# Altium PCB V3.3云台.PcbDoc (part 1 of 2)
Units mm, origin at the board's own origin, x right, y up, seen from the top; angles counter-clockwise.
Board outline 55 x 73 mm, 2 copper layers (Top Layer, Bottom Layer), stack 1.569 mm thick; 99 components, 126 nets, 372 pads, 178 vias.
Unrouted connection lines stored in the file: 226.
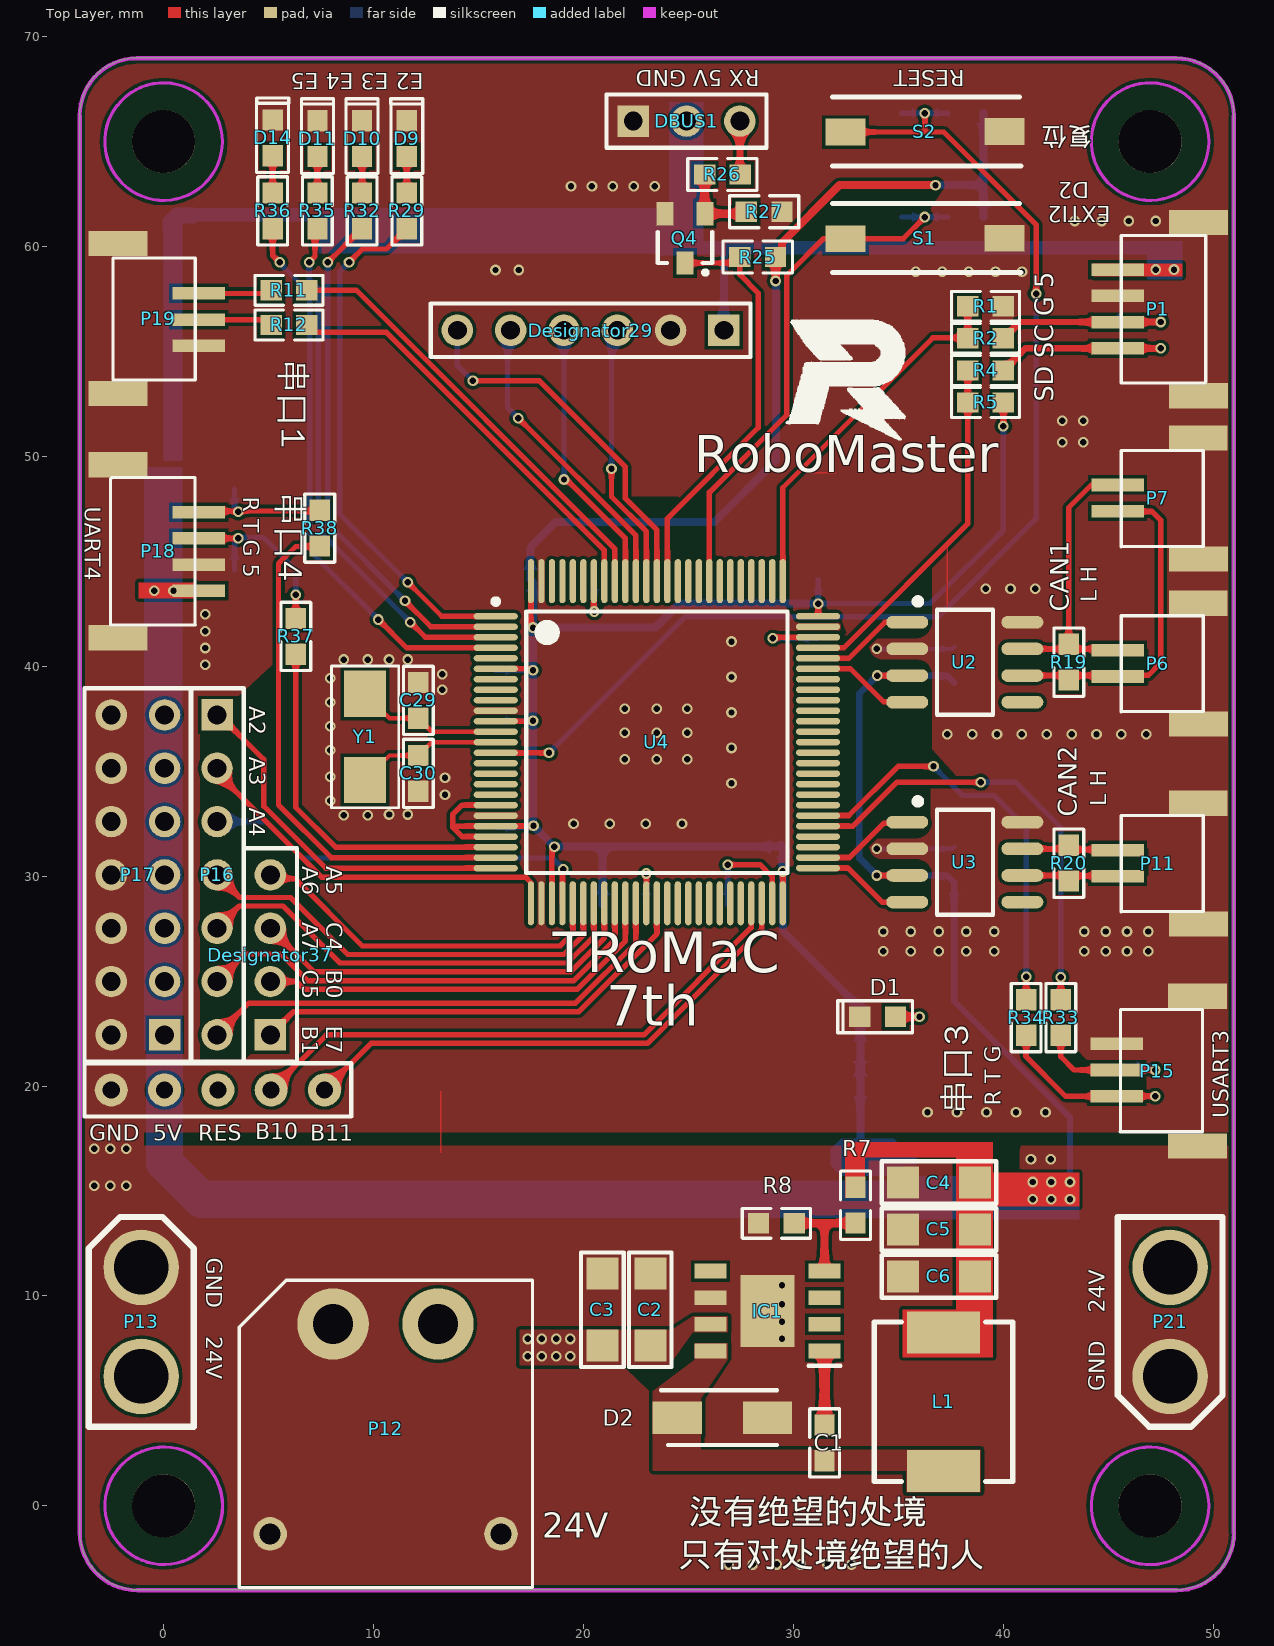
[diagram p0: Top Layer view]
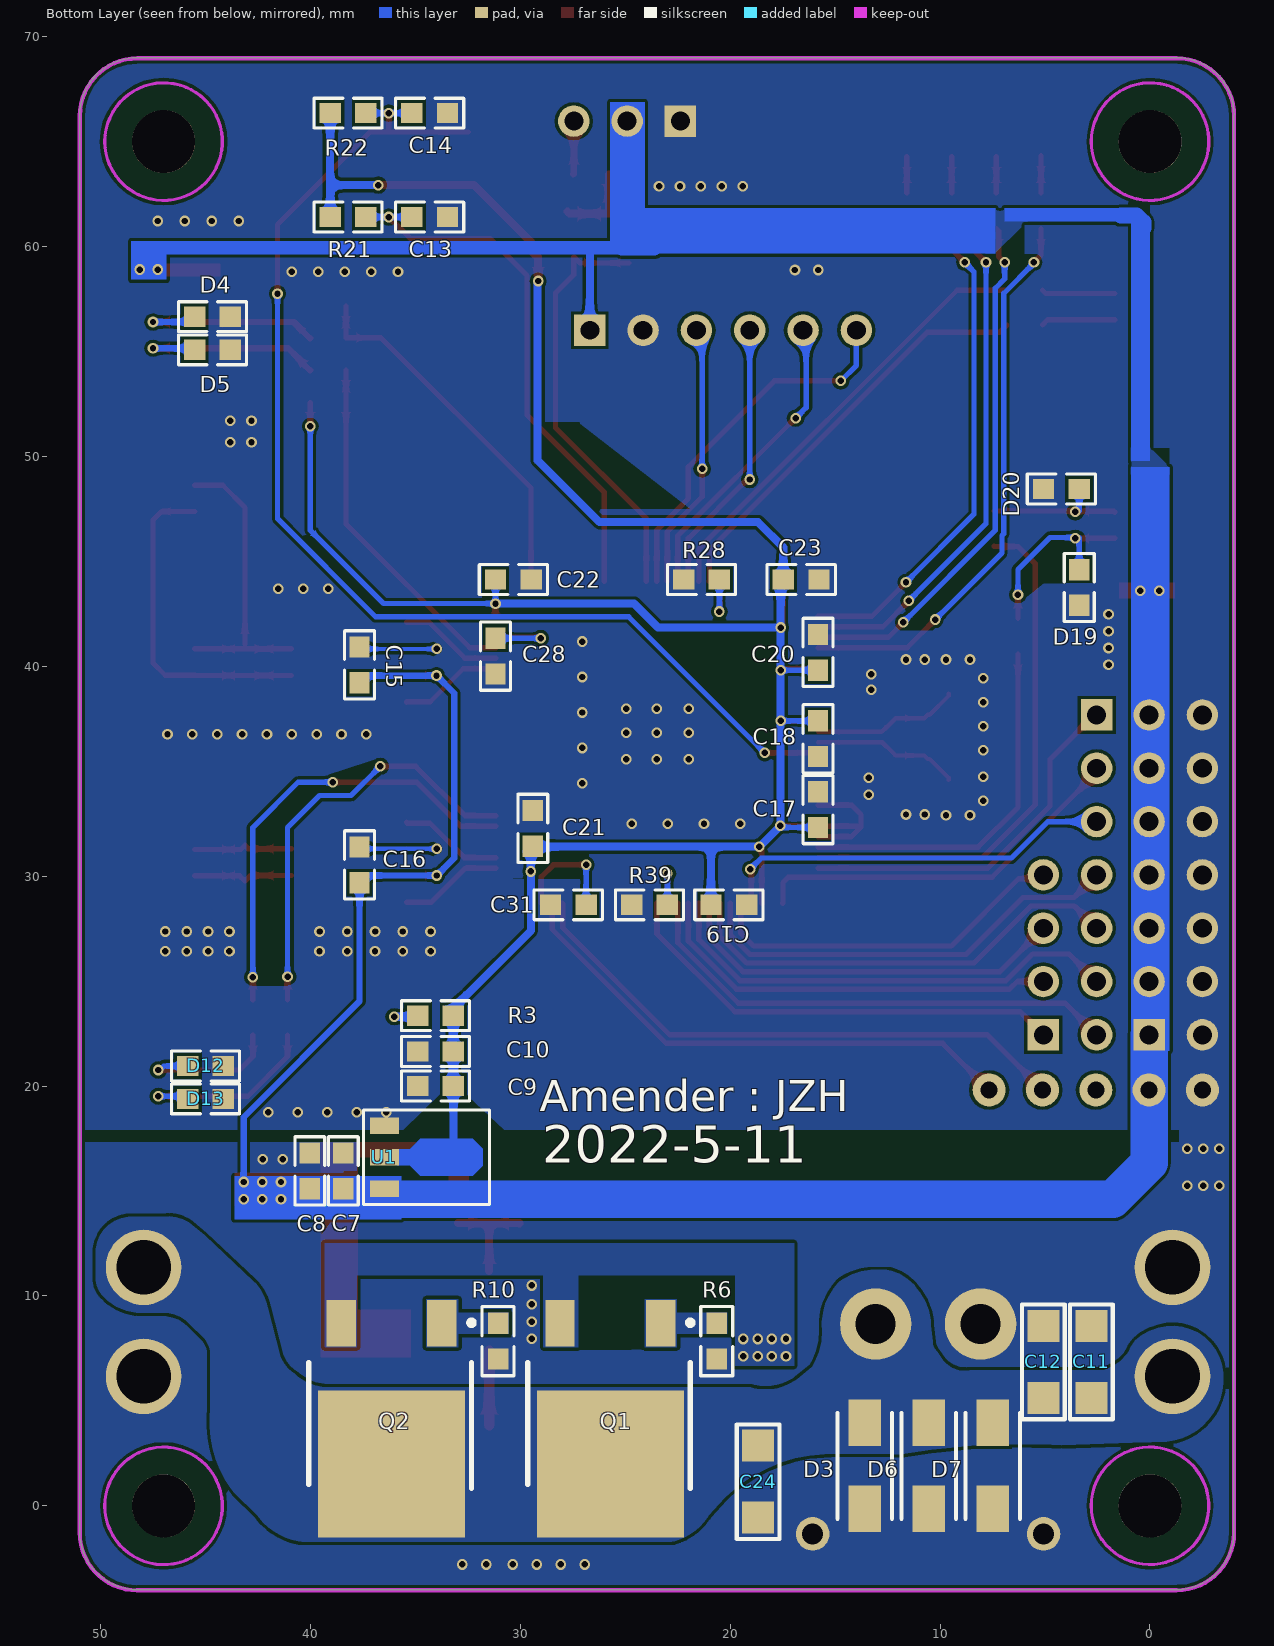
[diagram p1: Bottom Layer view, seen from below]
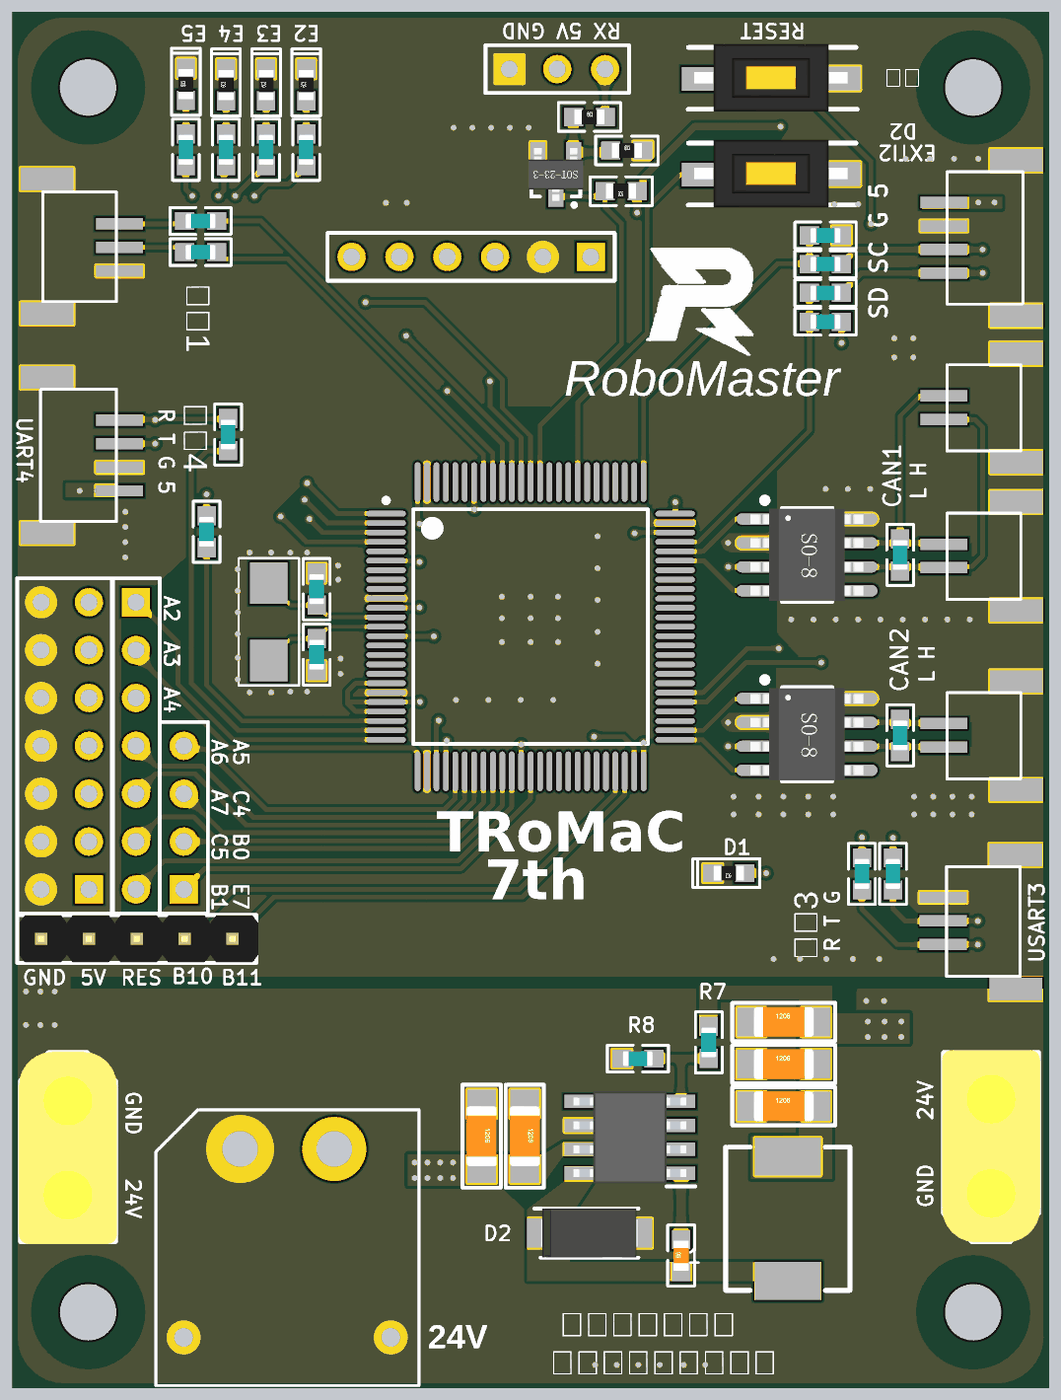
[diagram p2: 3D render of the assembled board from above, using the file's embedded part models]
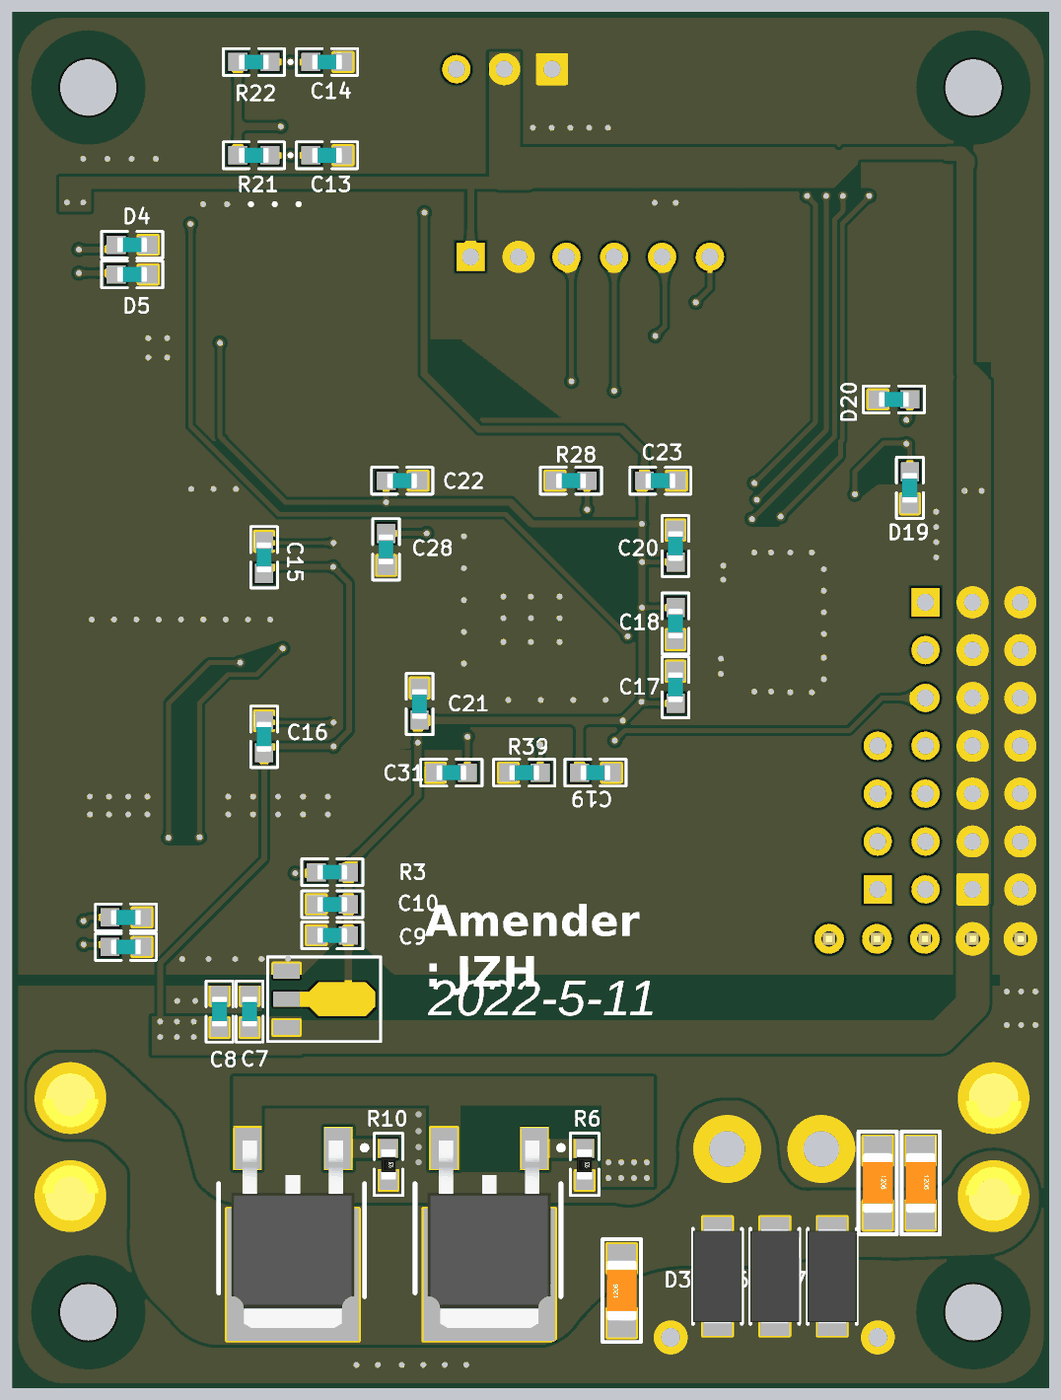
[diagram p3: 3D render of the assembled board from below, using the file's embedded part models]

## Layer stack, top to bottom
Top Solder: solder mask 0.0254, SM-001, Dk 4
Top Layer: signal copper 0.035
Dielectric 1: core 1.4986, Core-043, Dk 4.3
Bottom Layer: signal copper 0.035
Bottom Solder: solder mask 0.0254, SM-001, Dk 4

## Board outline
-4,-1.257 -4,66.256 -4.005,66.251 cw(c-1.261,66.251) -1.266,68.995 -1.266,68.99 48.246,68.99 cw(c48.246,66.246) 50.99,66.251 50.99,-1.271 50.995,-1.262 cw(c48.251,-1.262) 48.256,-4.005 48.261,-4 -1.257,-4 cw(c-1.257,-1.257)

## Design rules (kind name [scope] priority, off if disabled: settings)
Clearance [All] p1: gap=0.152 ignorepadtopadclearanceinfootprint=FALSE
ComponentClearance [All] p1: gap=0 collisioncheckmode=3 verticalgap=0 showdistances=FALSE
DiffPairsRouting DiffPair_DiffPairsRouting [InDifferentialPair ('NewDifferentialPair2')] p1: maxlimit=0.254 minlimit=0.203 mostfreqgap=0.203 toplayer_minwidth=0.203 toplayer_maxwidth=0.381 toplayer_prefwidth=0.203 bottomlayer_minwidth=0.203 bottomlayer_maxwidth=0.381 bottomlayer_prefwidth=0.203 maxuncoupledlength=12.7
DiffPairsRouting DiffPair_DiffPairsRouting_1 [All] p2: maxlimit=0.254 minlimit=0.203 mostfreqgap=0.203 toplayer_minwidth=0.203 toplayer_maxwidth=0.381 toplayer_prefwidth=0.203 bottomlayer_minwidth=0.203 bottomlayer_maxwidth=0.381 bottomlayer_prefwidth=0.203 maxuncoupledlength=12.7
DiffPairsRouting DiffPair_DiffPairsRouting_2 [InDifferentialPair ('NewDifferentialPair1')] p3: maxlimit=0.254 minlimit=0.203 mostfreqgap=0.203 toplayer_minwidth=0.203 toplayer_maxwidth=0.381 toplayer_prefwidth=0.203 bottomlayer_minwidth=0.203 bottomlayer_maxwidth=0.381 bottomlayer_prefwidth=0.203 maxuncoupledlength=12.7
DiffPairsRouting [All] p4: maxlimit=0.254 minlimit=0.254 mostfreqgap=0.254 toplayer_minwidth=0.381 toplayer_maxwidth=0.381 toplayer_prefwidth=0.381 bottomlayer_minwidth=0.381 bottomlayer_maxwidth=0.381 bottomlayer_prefwidth=0.381 maxuncoupledlength=12.7
HoleSize [All] p1: absolutevalues=TRUE maxlimit=5.08 minlimit=0.025 maxpercent=80.000 minpercent=20.000
HoleToHoleClearance [All] p1: gap=0.152 allowstackedmicrovias=TRUE
MatchedLengths DiffPair_MatchedLengths [InDifferentialPair ('NewDifferentialPair2')] p1: tolerance=0.127 checknetsindiffpair=TRUE checkdiffpairvsdiffpair=FALSE checkxsignals=FALSE checkothers=FALSE
MatchedLengths DiffPair_MatchedLengths_1 [All] p2: tolerance=0.127 checknetsindiffpair=TRUE checkdiffpairvsdiffpair=FALSE checkxsignals=FALSE checkothers=FALSE
MatchedLengths DiffPair_MatchedLengths_2 [InDifferentialPair ('NewDifferentialPair1')] p3: tolerance=0.127 checknetsindiffpair=TRUE checkdiffpairvsdiffpair=FALSE checkxsignals=FALSE checkothers=FALSE
MinimumSolderMaskSliver [All] p1: minsoldermaskwidth=0.152
PlaneConnect [All] p1: planeconnectstyle=Direct reliefexpansion=0.508 reliefentries=4 reliefconductorwidth=0.254 reliefairgap=0.254
PolygonConnect [All] p1: connectstyle=Direct reliefconductorwidth=0.254 reliefentries=4 polygonreliefangle="90 Angle" airgapwidth=0.254
RoutingVias [All] p1: holewidth=0.305 width=0.61 viastyle="Through Hole" minholewidth=0.025 minwidth=0.025 maxholewidth=0.711 maxwidth=1.27
SilkToSilkClearance [All] p1: silktosilkclearance=0
SilkToSolderMaskClearance [IsPad] p1: minsilkscreentomaskgap=0 clearancetoexposedcopper=TRUE
SolderMaskExpansion [All] p1: expansion=0.102 istentingtop=FALSE
Width [All] p1: maxlimit=12.7 minlimit=0.203 preferedwidth=0.254 minimp=50.000000 maximp=50.000000 favimp=50.000000
22 further rules are at their usual default settings.

## Classes and differential pairs
component class TRoMaC_2021_V3: 12Ω C1 C2 C3 C4 C5 C6 C7 C8 C9 C10 C13 C14 C15 C16 C17 C18 C19 C20 C21 C22 C23 C28 C29 C30 C31 D1 D2 D3 D4 D5 D9 D10 D11 D12 D13 D14 D19 D20 DBUS1 IC1 L1 P1 P6 P7 P11 P12 P13 P15 P16 P17 P18 P21 Q1 Q2 Q4 R1 R2 R3 R4 R5 R6 R7 R8 R10 R11 R12 R19 R20 R21 R22 R25 R26 R27 R28 R29 R32 R33 R34 R35 R36 R37 R38 R39 S1 S2 U1 U2 U3 U4 Y1 可以不焊

## Components (designator, comment, footprint, x,y, rotation, side; value= is the part's Value field where it differs from the comment)
B10 "HEADER5" HDR1X5 -2.499,19.812 r0 top (schematic designator U1)
C1 "10nF" C0603S 31.488,3.001 r90 top value=100pF
C2 "4.7uF" C1206L 23.182,9.342 r270 top value=100pF
C3 "4.7uF" C1206L 20.896,9.342 r270 top value=100pF
C4 "100uF" C1206L 36.936,15.4 r0 top
C5 "100uF" C1206L 36.936,13.165 r0 top
C6 "22uF" C1206L 36.936,10.93 r0 top
C7 "10uF/0603/16V" RC0603 38.431,15.958 r90 bottom
C8 "100nF/0603/16V" RC0603 40.028,15.958 r90 bottom
C9 "22uF/0603/16V" RC0603 34.04,19.998 r0 bottom
C10 "100nF/0603/16V" RC0603 34.04,21.649 r0 bottom
C11 "100uF" C1206L 2.794,6.858 r270 bottom (schematic designator C4)
C12 "100uF" C1206L 5.08,6.858 r270 bottom (schematic designator C4)
C13 "100nF/0603/50V" RC0603 34.319,61.4 r0 bottom value=100pF
C14 "100nF/0603/50V" RC0603 34.319,66.353 r0 bottom value=100pF
C15 "100nF" RC0603 37.66,40.064 r90 bottom
C16 "100nF" RC0603 37.66,30.539 r90 bottom
C17 "Cap Semi" RC0603 15.816,33.167 r270 bottom value=100nF/0603/10V
C18 "Cap Semi" RC0603 15.816,36.547 r90 bottom value=100nF/0603/10V
C19 "Cap Semi" RC0603 20.066,28.634 r0 bottom value=100nF/0603/10V
C20 "Cap Semi" RC0603 15.816,40.66 r270 bottom value=100nF/0603/10V
C21 "Cap Semi" RC0603 29.405,32.278 r270 bottom value=100nF/0603/10V
C22 "Cap Semi" RC0603 30.333,44.128 r0 bottom value=100nF/0603/10V
C23 "Cap Semi" RC0603 16.617,44.128 r0 bottom value=100nF/0603/10V
C24 "100uF" C1206L 18.669,1.147 r90 bottom (schematic designator C4)
C28 "2.2uF" RC0603 31.183,40.484 r270 bottom value=100pF
C29 "22pF/0603/50V" RC0603 12.133,38.374 r90 top value=100pF
C30 "22pF/0603/50V" RC0603 12.133,34.896 r270 top value=100pF
C31 "2.2uF" RC0603 27.715,28.634 r0 bottom value=100pF
D1 "G" 0603LED 34.016,23.3 r180 top
D2 "B340AE-13" DIOM5226X240N 26.62,4.199 r0 top
D3 "SMAJ24CA" DIONM5026X229N 13.589,1.905 r90 bottom
D4 "LESD5Z5.0CT1G" RC0603 44.667,56.652 r180 bottom
D5 "LESD5Z5.0CT1G" RC0603 44.667,55.077 r180 bottom
D6 "SMAJ24CA" DIONM5026X229N 10.541,1.905 r90 bottom (schematic designator D3)
D7 "SMAJ24CA" DIONM5026X229N 7.493,1.905 r90 bottom (schematic designator D3)
D9 "LED0" 0603LED 11.583,65.133 r90 top
D10 "LED3" 0603LED 9.452,65.133 r90 top
D11 "LED1" 0603LED 7.321,65.133 r90 top
D12 "LESD5Z5.0CT1G" RC0603 44.997,20.955 r180 bottom
D13 "LESD5Z5.0CT1G" RC0603 44.997,19.387 r180 bottom
D14 "LED2" 0603LED 5.19,65.171 r90 top
D19 "LESD5Z5.0CT1G" RC0603 3.37,43.752 r270 bottom
D20 "LESD5Z5.0CT1G" RC0603 4.22,48.446 r0 bottom
DBUS1 "DBUS" HDR1X3 22.369,65.972 r0 top
Designator29 "Comment" HDR1X6 26.689,56.007 r180 top
Designator37 "Comment" HDR1X4 5.08,22.438 r90 top
IC1 "TPS5430DDAR" SOIC127P600X170-9N 28.77,9.279 r180 top
L1 "22uH" "22uH 3A电感" 37.406,5.086 r270 top
P1 "SW" "4Pin  GH1.25" 47.371,57.023 r270 top
P6 "Header 2" "2Pin  GH1.25" 47.371,40.132 r270 top
P7 "Header 2" "2Pin  GH1.25" 47.371,48.006 r270 top
P11 "Header 2" "2Pin  GH1.25" 47.371,30.607 r270 top
P12 "Header 2" "XT30PW in" 13.07,8.662 r180 top
P13 "Header 2" XT30-LI-P -1.075,8.718 r270 top
P15 "Header 3" "3PIN  GH1.25" 47.332,20.76 r270 top
P16 "Header 7" HDR1X7 2.54,37.678 r270 top
P17 "Header 7X2" HDR2X7 0.041,22.438 r90 top
P18 "USART1" "4Pin  GH1.25" -0.254,45.466 r90 top
P19 "Header 3" "3PIN  GH1.25" -0.254,56.515 r90 top (schematic designator P15)
P21 "Header 2" XT30-LI-P 47.95,8.806 r90 top
Q1 "AOD403" N_MOSFET 25.709,5.295 r0 bottom
Q2 "AOD403" N_MOSFET 36.136,5.295 r0 bottom
Q4 "8050" NPN 24.833,60.384 r180 top
R1 "10K" RC0603 39.155,57.15 r0 top value=1K
R2 "100R" RC0603 39.155,55.622 r180 top value=1K
R3 "4K7/0603/10v" RC0603 34.04,23.35 r0 bottom value=1K
R4 "100R" RC0603 39.155,54.094 r180 top value=1K
R5 "10K" RC0603 39.155,52.565 r0 top value=1K
R6 "1M/0603" 0603S 20.642,7.845 r270 bottom
R7 "10K" RC0603 32.961,14.32 r90 top value=1K
R8 "3.24K" RC0603 29.19,13.456 r0 top value=1K
R10 "1M/0603" 0603S 31.056,7.845 r270 bottom
R11 "100R" RC0603 5.969,57.912 r0 top value=1K
R12 "100R" RC0603 5.969,56.261 r0 top value=1K
R19 "120R" RC0603 43.121,40.191 r90 top value=1K
R20 "120R" RC0603 43.121,30.615 r90 top value=1K
R21 "10K/0603/5%" RC0603 38.207,61.4 r180 bottom value=1K
R22 "10K/0603/5%" RC0603 38.207,66.353 r180 bottom value=1K
R25 "10K/0603" 0603S 28.301,59.495 r180 top value=1K
R26 "4.7K/0603" 0603S 26.621,63.432 r0 top value=1K
R27 "10K/0603" 0603S 28.604,61.654 r0 top value=1K
R28 "10k" RC0603 21.365,44.128 r180 bottom value=1K
R29 "1k" RC0603 11.583,61.693 r270 top value=1K
R32 "1k" RC0603 9.452,61.693 r270 top value=1K
R33 "100R" RC0603 42.74,23.261 r90 top value=1K
R34 "100R" RC0603 41.089,23.261 r90 top value=1K
R35 "1k" RC0603 7.321,61.693 r270 top value=1K
R36 "1k" RC0603 5.19,61.693 r270 top value=1K
R37 "100R" RC0603 6.291,41.422 r270 top value=1K
R38 "100R" RC0603 7.434,46.58 r270 top value=1K
R39 "10K" RC0603 23.845,28.634 r180 bottom value=1K
S1 "KEY" Key-2 36.263,60.384 r180 top
S2 "KEY" Key-2 36.263,65.464 r180 top
U1 "AMS1117_3.3" SOT89 36.472,16.608 r270 bottom
U2 "TJA1051T" SOIC8E 38.168,40.191 r0 top
U3 "TJA1051T" SOIC8E 38.168,30.666 r0 top
U4 "STM32F407VET6_1" STM32F407ve 23.495,36.381 r0 top
Y1 "8M" "Crystal oscillator/5032" 9.593,36.635 r270 top

## Footprints (in the part's own frame and the unit in brackets; to place one, negate y for a bottom-side part, rotate by r counter-clockwise, add the part's x,y. Pads: shape width x height; smd on the part's side, far side on the other; paste and mask are expansions set on the pad)
"2Pin  GH1.25" [mm]
  rect 1.2x2.8 smd: 0(-2.866,1.922) 0(2.891,1.928)
  rect 0.6x2.5 smd: 1(-0.629,-1.928) 2(0.621,-1.928)
  silkscreen extent -2.28,-1.76 2.31,2.16
"3PIN  GH1.25" [mm]
  rect 1.2x2.8 smd: 0(-3.516,1.922) 0(3.618,1.928)
  rect 0.6x2.5 smd: 1(-1.254,-1.928) 2(-0.004,-1.928) 3(1.246,-1.928)
  silkscreen extent -2.88,-1.76 2.93,2.16
"4Pin  GH1.25" [mm]
  rect 1.2x2.8 smd: 0(-4.112,1.925) 0(4.137,1.925)
  rect 0.6x2.5 smd: 1(-1.875,-1.925) 2(-0.625,-1.925) 3(0.625,-1.925) 4(1.875,-1.925)
  silkscreen extent -3.51,-1.75 3.53,2.28
"22uH 3A电感" [mm]
  rect 2x3.5 smd: 1(-3.173,-0.254) 2(3.427,-0.254)
  silkscreen extent -3.67,-3.55 3.93,3.05
0603LED [mil]
  rect 40x38 smd: 1(-33.46,0) 2(33.46,0)
  silkscreen extent -65,-30 75,30, body extent -31,-16 32,16, height 12
0603S [mil]
  rect 40x38 smd: 1(-33.46,0) 2(33.46,0)
  silkscreen extent -65,-30 65,30, body extent -31,-16 32,16, height 12
C0603S [mil]
  rect 40x38 smd: 1(-33.46,0) 2(33.46,0)
  silkscreen extent -64,-28 64,28, body extent -31,-16 32,16, height 12
C1206L [mil]
  rect 60x60 smd: 1(-67.5,0) 2(67.5,0)
  silkscreen extent -108,-40 108,40, body extent -63,-31 63,32, height 39
"Crystal oscillator/5032" [mm]
  rect 2.2x2 smd: 1(2.05,0) 2(-2.05,0)
  silkscreen extent -3.38,-1.6 3.37,1.6, body extent -2.5,-1.6 2.5,1.6, height 1.2
DIOM5226X240N [mm]
  rect 2.35x1.55 smd: 1(-2.15,0) 2(2.15,0)
  silkscreen extent -2.92,-1.3 2.6,1.3, body extent -2.6,-1.3 2.6,1.3, height 2.4
DIONM5026X229N [mm]
  rect 2.2x1.55 smd: 1(-2.05,0) 2(2.05,0)
  silkscreen extent -2.52,-1.3 2.52,1.3, body extent -2.52,-1.3 2.52,1.3, height 2.29
HDR1X3 [mm] "Connector; Header; 3 Position"
  rect 1.5x1.5 hole 0.9: 1(0,0)
  round 1.5 hole 0.9: 2(2.54,0) 3(5.08,0)
  silkscreen extent -1.27,-1.27 6.35,1.27
HDR1X4 [mm]
  rect 1.5x1.5 hole 0.9: 1(0,0)
  round 1.5 hole 0.9: 2(2.54,0) 3(5.08,0) 4(7.62,0)
  silkscreen extent -1.27,-1.27 8.89,1.27
HDR1X5 [mil] "Connector; Header; 5 Position"
  round 62 hole 32: 1(0,0) 2(100,0) 3(200,0) 4(300,0) 5(400,0)
  silkscreen extent -50,-50 450,50, body extent -46,-49 454,49, height 100
HDR1X6 [mm]
  rect 1.5x1.5 hole 0.9: 1(0,0)
  round 1.5 hole 0.9: 2(2.54,0) 3(5.08,0) 4(7.62,0) 5(10.16,0) 6(12.7,0)
  silkscreen extent -1.27,-1.27 13.97,1.27
HDR1X7 [mm] "Connector; Header; 7 Position"
  rect 1.5x1.5 hole 0.9: 1(0,0)
  round 1.5 hole 0.9: 2(2.54,0) 3(5.08,0) 4(7.62,0) 5(10.16,0) 6(12.7,0) 7(15.24,0)
  silkscreen extent -1.27,-1.27 16.51,1.27
HDR2X7 [mm] "Connector; Header; 7x2 Position"
  rect 1.5x1.5 hole 0.9: 1(0,0)
  round 1.5 hole 0.9: 2(0,2.54) 3(2.54,0) 4(2.54,2.54) 5(5.08,0) 6(5.08,2.54) 7(7.62,0) 8(7.62,2.54) 9(10.16,0) 10(10.16,2.54) 11(12.7,0) 12(12.7,2.54) 13(15.24,0) 14(15.24,2.54)
  silkscreen extent -1.27,-1.27 16.51,3.81
Key-2 [mm]
  rect 1.905x1.27 smd: A(-3.788,-0.012) B(3.787,0.012)
  silkscreen extent -4.57,-1.66 4.39,1.63, body extent -4.07,-1.85 4.07,1.75, height 2.36
N_MOSFET [mm] "TO252-3"
  rect 1.4x2.2 smd: 1(-2.4,-3.4) 3(2.4,-3.4)
  rect 7x7 smd: 2(0,3.302)
  silkscreen extent -3.93,-3.55 3.94,4.47, body extent -3.27,-3.81 3.27,6.13, height 2.39
NPN [mm]
  rect 0.8x1.1 smd: 1(-0.95,-1.175) 2(0.95,-1.175) 3(0,1.175)
  silkscreen extent -1.3,-0.3 1.3,1.7, body extent -1.45,-1.4 1.45,1.4, height 1.2
RC0603 [mil]
  rect 40x38 smd: 1(-33.46,0) 2(33.46,0)
  silkscreen extent -64,-28 64,28, body extent -31,-16 31,16, height 37
SOIC8E [mm]
  oval 2x0.6 smd: 1(-2.743,1.905) 2(-2.743,0.635) 3(-2.743,-0.635) 4(-2.743,-1.905) 5(2.743,-1.905) 6(2.743,-0.635) 7(2.743,0.635) 8(2.743,1.905)
  silkscreen extent -2.38,-2.5 1.35,3.05, body extent -3,-2.45 3,2.45, height 1.7
SOIC127P600X170-9N [mm]
  rect 1.525x0.7 smd: 1(-2.712,1.905) 2(-2.712,0.635) 3(-2.712,-0.635) 4(-2.712,-1.905) 5(2.712,-1.905) 6(2.712,-0.635) 7(2.712,0.635) 8(2.712,1.905)
  rect 2.56x3.45 smd: 9(0,0)
  silkscreen extent -3.47,2.6 -1.95,2.6, body extent -3,-2.45 3,2.45, height 1.7
SOT89 [mm]
  rect 0.8x1.4 smd: 1(-1.5,0) 2(0,0) 3(1.5,0)
  Top Layer region: -0.9,4.2 0.9,4.2 0.9,1.7 -0.9,1.7
  Top Layer region: -0.4,1.2 0.4,1.2 0.4,0.6 -0.4,0.6
  Top Layer region: -0.9,1.7 0,2.6 0.9,1.7 0,0.8
  Top Layer region: -0.4,4.7 0.4,4.7 0.4,4.1 -0.4,4.1
  Top Layer region: -0.9,4.2 -0.4,4.7 0.102,4.198 -0.398,3.698
  Top Layer region: -0.098,4.202 0.4,4.7 0.9,4.2 0.402,3.702
  silkscreen extent -2.25,-1 2.25,5
STM32F407ve [mm] "TSQFP, 100-Leads, Body 14.00x14.00mm, Pitch 0.50mm, IPC Medium Density"
  oval 2.1x0.3 smd: 1(-7.675,6) 2(-7.675,5.5) 3(-7.675,5) 4(-7.675,4.5) 5(-7.675,4) 6(-7.675,3.5) 7(-7.675,3) 8(-7.675,2.5) 9(-7.675,2) 10(-7.675,1.5) 11(-7.675,1) 12(-7.675,0.5) 13(-7.675,0) 14(-7.675,-0.5) 15(-7.675,-1) 16(-7.675,-1.5) 17(-7.675,-2) 18(-7.675,-2.5) 19(-7.675,-3) 20(-7.675,-3.5) 21(-7.675,-4) 22(-7.675,-4.5) 23(-7.675,-5) 24(-7.675,-5.5) 25(-7.675,-6) 51(7.675,-6) 52(7.675,-5.5) 53(7.675,-5) 54(7.675,-4.5) 55(7.675,-4) 56(7.675,-3.5) 57(7.675,-3) 58(7.675,-2.5) 59(7.675,-2) 60(7.675,-1.5) 61(7.675,-1) 62(7.675,-0.5) 63(7.675,0) 64(7.675,0.5) 65(7.675,1) 66(7.675,1.5) 67(7.675,2) 68(7.675,2.5) 69(7.675,3) 70(7.675,3.5) 71(7.675,4) 72(7.675,4.5) 73(7.675,5) 74(7.675,5.5) 75(7.675,6)
  oval 0.3x2.1 smd: 26(-6,-7.675) 27(-5.5,-7.675) 28(-5,-7.675) 29(-4.5,-7.675) 30(-4,-7.675) 31(-3.5,-7.675) 32(-3,-7.675) 33(-2.5,-7.675) 34(-2,-7.675) 35(-1.5,-7.675) 36(-1,-7.675) 37(-0.5,-7.675) 38(0,-7.675) 39(0.5,-7.675) 40(1,-7.675) 41(1.5,-7.675) 42(2,-7.675) 43(2.5,-7.675) 44(3,-7.675) 45(3.5,-7.675) 46(4,-7.675) 47(4.5,-7.675) 48(5,-7.675) 49(5.5,-7.675) 50(6,-7.675) 76(6,7.675) 77(5.5,7.675) 78(5,7.675) 79(4.5,7.675) 80(4,7.675) 81(3.5,7.675) 82(3,7.675) 83(2.5,7.675) 84(2,7.675) 85(1.5,7.675) 86(1,7.675) 87(0.5,7.675) 88(0,7.675) 89(-0.5,7.675) 90(-1,7.675) 91(-1.5,7.675) 92(-2,7.675) 93(-2.5,7.675) 94(-3,7.675) 95(-3.5,7.675) 96(-4,7.675) 97(-4.5,7.675) 98(-5,7.675) 99(-5.5,7.675) 100(-6,7.675)
  silkscreen extent -7.8,-6.22 6.22,6.82, body extent -7,-7 7,7, height 1.6
XT30-LI-P [mm]
  round 3.6 hole 2.6: 1(-2.644,0.003) 2(2.556,0.003)
  silkscreen extent -5.04,-2.5 4.96,2.5, body extent -5.1,-2.6 5.1,2.6, height 9.4
"XT30PW in" [mm]
  round 1.6 hole 1: 0(-3,10) 0(8,10)
  round 3.4 hole 1.9: 1(0,0) 2(5,0)
  silkscreen extent -4.5,-2.08 9.47,12.55

## Part data
C1: library part Cap_6, "Capacitor", LatestRevisionDate=17-Jul-2002, LatestRevisionNote="Re-released for DXP Platform.", PackageDescription="Radial Cap, Thru-Hole; 2 Leads; 0.3 in Pin Spacing", PackageReference=RAD-0.3, Published=8-Jun-2000, Publisher="Altium Limited"
C2 C3: library part Cap_4, "Capacitor", LatestRevisionDate=17-Jul-2002, LatestRevisionNote="Re-released for DXP Platform.", PackageDescription="Radial Cap, Thru-Hole; 2 Leads; 0.3 in Pin Spacing", PackageReference=RAD-0.3, Published=8-Jun-2000, Publisher="Altium Limited"
C4 C5 C7 C8 C9 C10 C11 C12 C15 C16 C24: library part C
C6: library part C_3
C13 C14 C28 C29 C30 C31: library part Cap, "Capacitor", LatestRevisionDate=17-Jul-2002, LatestRevisionNote="Re-released for DXP Platform.", PackageDescription="Radial Cap, Thru-Hole; 2 Leads; 0.3 in Pin Spacing", PackageReference=RAD-0.3, Published=8-Jun-2000, Publisher="Altium Limited"
C17 C18 C19 C20 C21 C22 C23: "Capacitor (Semiconductor SIM Model)", LatestRevisionDate=29-May-2009, LatestRevisionNote="IPC-7351 Footprint Added.", PackageDescription="Chip Capacitor", PackageReference=C1206, Published=8-Jun-2000, Publisher="Altium Limited"
D1 D14: library part LED1, "Typical RED GaAs LED", LatestRevisionDate=08-Jul-2005, LatestRevisionNote="Mech Layer 1 removed.", PackageDescription="LED; 2 Leads", PackageReference=LED-1, Published=8-Jun-2000, Publisher="Altium Limited"
D2: "Schottky Diode", Manufacturer_Name="Diodes Inc.", Height=2.4mm, Manufacturer_Part_Number=B340AE-13
D3 D6 D7: "TVS Diode (Bi-directional)", Manufacturer_Name=LITTELFUSE, Mouser2 Part Number=576-SMAJ24CA, Datasheet Link=https://componentsearchengine.com//SMAJ24CA.pdf, Height=2.29mm, Manufacturer_Part_Number=SMAJ24CA, Mouser2 Price/Stock=https://www.mouser.com/Search/Refine.aspx?Keyword=576-SMAJ24CA
D4 D5 D12 D13 D19 D20: library part ESD_LESD5Z5.0CT1G, BOM_LCSC Assembly=Yes, BOM_Manufacturer=LRC, BOM_Manufacturer Part=LESD5Z5.0CT1G, BOM_Supplier=LCSC, BOM_Supplier Part=C136167, Contributor=LCSC, SMT Type=Extend, spicePre=D, spiceSymbolName=LESD5Z5.0CT1G
D9: "Typical INFRARED GaAs LED", LatestRevisionDate=08-Jul-2005, LatestRevisionNote="Mech Layer 1 removed.", PackageDescription="LED; 2 Leads", PackageReference=LED-0, Published=8-Jun-2000, Publisher="Altium Limited"
D10: library part LED0, "Typical INFRARED GaAs LED", LatestRevisionDate=08-Jul-2005, LatestRevisionNote="Mech Layer 1 removed.", PackageDescription="LED; 2 Leads", PackageReference=LED-0, Published=8-Jun-2000, Publisher="Altium Limited"
D11: "Typical RED GaAs LED", LatestRevisionDate=08-Jul-2005, LatestRevisionNote="Mech Layer 1 removed.", PackageDescription="LED; 2 Leads", PackageReference=LED-1, Published=8-Jun-2000, Publisher="Altium Limited"
DBUS1: library part "Header 3", "Header, 3-Pin", LatestRevisionDate=17-Jul-2002, LatestRevisionNote="Re-released for DXP Platform.", Publisher="Altium Limited"
IC1: "Integrated Circuit", Manufacturer_Name="Texas Instruments", Mouser2 Part Number=595-TPS5430DDAR, Datasheet Link=http://www.ti.com/lit/gpn/tps5430, Height=1.7mm, Manufacturer_Part_Number=TPS5430DDAR, Mouser2 Price/Stock=https://www.mouser.com/Search/Refine.aspx?Keyword=595-TPS5430DDAR
L1: library part 铁芯电感, "铁芯电感"
P1 P18: library part "Header 4", "Header, 4-Pin", LatestRevisionDate=17-Jul-2002, LatestRevisionNote="Re-released for DXP Platform.", Publisher="Altium Limited"
P6 P7 P11 P12 P13 P21: "Header, 2-Pin", LatestRevisionDate=17-Jul-2002, LatestRevisionNote="Re-released for DXP Platform.", Publisher="Altium Limited"
P15 P19: "Header, 3-Pin", LatestRevisionDate=17-Jul-2002, LatestRevisionNote="Re-released for DXP Platform.", Publisher="Altium Limited"
P16: "Header, 7-Pin", LatestRevisionDate=17-Jul-2002, LatestRevisionNote="Re-released for DXP Platform.", Publisher="Altium Limited"
P17: "Header, 7-Pin, Dual row", LatestRevisionDate=17-Jul-2002, LatestRevisionNote="Re-released for DXP Platform.", Publisher="Altium Limited"
Q1 Q2: library part PMOS-2, "P-Channel Power MOSFET", ComponentLink1Description="Manufacturer Link", ComponentLink1URL=http://www.irf.com/, DatasheetVersion=PD-9.390D, LatestRevisionDate=17-Jul-2002, LatestRevisionNote="Re-released for DXP Platform.", Note="Pin 4 not drawn and electrically connected to Pin 2.", PackageDescription="TO, Thru-Hole, Vertical, Heatsink Mounted; 3 In-Line Leads; Pitch 2.54 mm", PackageReference=TO-220AB, PackageVersion=Feb-1997, Published=8-Jun-2000, Publisher="Altium Limited"
Q4: library part NPN, "NPN Bipolar Transistor", Code_JEDEC=TO-226-AA, LatestRevisionDate=17-Jul-2002, LatestRevisionNote="Re-released for DXP Platform.", PackageDescription="TO, Flat Index; 3 In-Line, Axial Leads; Body Dia. 4.8mm; Leads 0.55 x 0.51 mm (max)", PackageReference=TO-226-AA, Published=8-Jun-2000, Publisher="Altium Limited"
R1 R2 R3 R4 R5 R11 R12 R21 R22 R25 R26 R27 R33 R34 R37 R38 R39: library part Res3, "Resistor", LatestRevisionDate=29-May-2009, LatestRevisionNote="IPC-7351 Footprint Added.", PackageDescription="Chip Resistor", PackageReference=J1-0603, Published=8-Jun-2000, Publisher="Altium Limited"
R6 R10: library part R_3
R7 R8: library part Res3_1, "Resistor", LatestRevisionDate=29-May-2009, LatestRevisionNote="IPC-7351 Footprint Added.", PackageDescription="Chip Resistor", PackageReference=J1-0603, Published=8-Jun-2000, Publisher="Altium Limited"
R19 R20: library part Res3_3, "Resistor", LatestRevisionDate=29-May-2009, LatestRevisionNote="IPC-7351 Footprint Added.", PackageDescription="Chip Resistor", PackageReference=J1-0603, Published=8-Jun-2000, Publisher="Altium Limited"
R28 R29 R32 R35 R36: library part "Res Semi", "Semiconductor Resistor", LatestRevisionDate=17-Jul-2002, LatestRevisionNote="Re-released for DXP Platform.", PackageDescription="Axial Device, Thru-Hole; 2 Leads; 0.5 in Pin Spacing", PackageReference=AXIAL-0.5, Published=8-Jun-2000, Publisher="Altium Limited"
S1 S2: library part KEY-2
U1: library part AMS1117_5
U2 U3: "CAN收发器芯片"
U4: "方"
Y1: library part XTAL, "Crystal Oscillator", LatestRevisionDate=17-Jul-2002, LatestRevisionNote="Re-released for DXP Platform.", PackageDescription="Crystal, Thru-Hole; 2 Leads; Body 3.1 x 8.2 mm (Dia.xH)", PackageReference=R38, Published=8-Jun-2000, Publisher="Altium Limited"

## Free pads (board coordinates)
  round 3 hole 3 unplated: 1(-0.005,64.995) 2(46.995,64.995) 3(0,-0.005) 4(46.995,-0.005)

## Via types
v1: diameter 0.508, hole 0.305, Top Layer to Bottom Layer, tented both sides, 178 vias

## Nets (pads, with @x,y where several pads share a name; then routed paths per layer and width w, separated by ;. In a path a pad name is that pad's centre, name@x,y a point inside that pad or via, vN(x,y) a via of type N, cw(c..) or ccw(c..) an arc to the next point about the centre after c; other vN are vias at no path point)
3V3: C9.1 C10.1 C17.2 C18.2 C19.2 C20.2 C21.2 C22.2 C23.2 R3.1 R5.2 R21.1 R22.1 R25.1 U1.2 U4.6 U4.11 U4.19 U4.21 U4.22 U4.28 U4.50 U4.75 U4.100 | length 143.1
  Top Layer w0.254: U4.22 14.22,31.881 13.768,32.333 ; U4.19 14.213,33.381 13.768,32.935 13.768,32.333 ; U4.11 17.578,37.381 v1(17.594,37.397) ; U4.6 17.454,39.881 17.525,39.81 v1(17.594,39.81) ; v1@17.495,42.009 U4.100 ; v1(17.619,32.393) 17.607,32.381 U4.21 13.815,32.381 13.768,32.333 ; U4.28 18.495,31.213 18.615,31.333 v1(18.615,31.402) ; U4.50 v1(29.495,30.223) ; U4.75 31.183,42.394 v1(31.183,42.985) ; v1(40.005,51.435) R5.2
  Top Layer w0.381: v1(29.151,58.352) R25.1 29.176,59.495 29.469,59.787 29.469,60.193 32.2,62.924 v1(36.771,62.924)
  Bottom Layer w0.254: C17.2 v1@17.475,32.317 ; C18.2 v1(17.594,37.397) ; C20.2 v1(17.594,39.81) ; v1@17.594,32.418 v1(17.619,32.393) ; v1@18.61,31.402 v1(18.615,31.402) ; C21.2@29.495,31.174 C21.2@29.634,31.174 ; C22.2 v1(31.183,42.985) 36.514,42.985 40.005,46.476 v1(40.005,51.435)
  Bottom Layer w0.381: v1@17.594,32.418 v1(17.594,37.397) v1(17.594,39.81) v1(17.594,41.842) ; v1(17.619,32.393) v1@18.61,31.402 ; v1(18.615,31.402) 20.916,31.402 ; C19.2 20.916,31.402 ; v1(29.151,58.352) 29.172,58.331 29.172,49.804 26.23,46.863 18.669,46.863 17.467,45.661 C23.2 17.594,44.001 v1(17.594,41.842) ; C21.2@29.38,31.402 20.916,31.402 ; C21.2@29.495,31.174 v1(29.495,30.223) 29.495,27.401 R3.1@33.19,23.706 ; v1(31.183,42.985) 24.579,42.985 23.436,41.842 v1(17.594,41.842) ; 33.19,17.006 C10.1 R3.1 ; v1(36.771,62.924) 39.057,62.924 ; R21.1 39.057,62.924 ; R22.1 39.057,62.924
  Bottom Layer w0.508: C21.2 29.405,31.402 C21.2@29.634,31.174 ; 32.027,16.632 32.027,16.608 34.772,16.608 ; R3.1 R3.1@33.19,23.706
5V: B10.2 C4.2 C5.2 C6.2 C7.1 C8.1 C15.1 C16.1 DBUS1.2 Designator29.1 L1.1 P1.1 P17.1 P17.3 P17.5 P17.7 P17.9 P17.11 P17.13 P18.1 R7.2 U1.3 U2.3 U3.3 | length 95.7
  Top Layer w0.254: v1(33.977,30.031) U3.3 ; v1(33.993,39.556) U2.3
  Bottom Layer w0.254: 9.699,59.876 14.606,59.876 ; 23.495,60.071 23.622,59.944 ; 24.638,59.944 24.638,61.468
  Bottom Layer w0.305: C15.1 37.318,39.556 v1(33.993,39.556) 33.147,38.71 33.147,30.861 v1(33.977,30.031) 37.318,30.031 C16.1 37.66,24.038 43.18,18.518 v1(43.18,15.426)
  Bottom Layer w0.381: 26.308,60.054 26.689,59.673 Designator29.1
  Bottom Layer w0.762: 0.315,60.888 0.315,61.155 0.635,61.475 1.374,61.475 ; 23.622,59.944 24.638,59.944 25.146,59.944
  Bottom Layer w1.778: P17.1 0.041,16.342 1.778,14.605 37.846,14.605
  other v1: 41.402,14.605 42.291,14.605 43.18,14.605 41.402,15.426 42.291,15.426 -0.447,43.591 0.465,43.591 47.269,58.898 48.133,58.898
24V: C2.2 C3.2 IC1.7 Q1.3 Q2.3
  other v1: 17.34,7.122 18.017,7.122 18.695,7.122 19.372,7.122 17.34,7.949 18.017,7.949 18.695,7.949 19.372,7.949
ADC12_IN4(PA4): P16.3 U4.29 | length 19.1
  Top Layer w0.254: U4.29 18.995,30.289 v1(19.04,30.335)
  Bottom Layer w0.254: P16.3 4.867,32.598 6.604,30.861 18.514,30.861 v1(19.04,30.335)
BOOT0: R28.2 U4.94 | length 3
  Top Layer w0.254: v1@20.495,42.583 U4.94
  Bottom Layer w0.254: v1(20.515,42.604) R28.2
BOOT1: R39.2 U4.37 | length 2.9
  Top Layer w0.254: v1@22.928,30.089 22.995,30.022 U4.37
  Bottom Layer w0.254: R39.2@22.995,28.706 22.928,28.772 22.995,28.839 v1(22.995,30.124)
CAN1_H: P6.1 P7.1 R19.2 U2.7 | length 14
  Top Layer w0.254: U2.7 43.121,40.826 45.506,40.826 P6.1@45.511,40.82 ; R19.2 43.121,47.566 44.176,48.621 P7.1@45.511,48.621
CAN1_L: P6.2 P7.2 R19.1 U2.6 | length 15.8
  Top Layer w0.254: U2.6 43.121,39.556 45.497,39.556 45.511,39.57 46.916,39.57 47.498,40.152 47.498,46.968 47.095,47.371 P7.2@45.511,47.371
CAN1_RX: U2.4 U4.70 | length 4.9
  Top Layer w0.254: U4.70 32.718,39.881 34.291,38.307 35.403,38.307 U2.4
CAN1_TX: U2.1 U4.71 | length 5
  Top Layer w0.254: U4.71 32.643,40.381 34.358,42.096 U2.1
CAN2_H: P11.1 R20.2 U3.7 | length 4.8
  Top Layer w0.254: U3.7 42.957,31.301 R20.2 43.321,31.265 P11.1@45.511,31.265
CAN2_L: P11.2 R20.1 U3.6 | length 4.8
  Top Layer w0.254: U3.6 42.855,30.031 R20.1 43.371,30.015 P11.2@45.511,30.015
CAN2_RX: U3.4 U4.51 | length 4.9
  Top Layer w0.254: U4.51 32.611,30.381 34.231,28.761 U3.4
CAN2_TX: U3.1 U4.52 | length 5
  Top Layer w0.254: U4.52 32.668,30.881 34.314,32.526 35.381,32.526 U3.1
DIG0: 
DIG1: 
DIG2: 
DIG3: 
DN: 
DP: 
EXTI2(PD2): C13.2 R21.2 S1.B U4.83 | length 26
  Top Layer w0.254: U4.83 25.995,48.283 29.684,51.973 29.684,58.619 31.436,60.371 S1.B 35.235,60.371 v1(36.263,61.4)
  Bottom Layer w0.254: C13.2 v1(36.263,61.4) R21.2
GND: B10.1 C2.1 C3.1 C4.1 C5.1 C6.1 C7.2 C8.2 C9.2 C10.2 C11.1 C12.1 C13.1 C14.1 C15.2 C16.2 C17.1 C18.1 C19.1 C20.1 C21.1 C22.1 C23.1 C24.1 C28.2 C29.2 C30.2 C31.2 D1.2 D2.2 D3.1 D4.2 D5.2 D6.1 D7.1 D9.2 D10.2 D11.2 D12.2 D13.2 D14.2 D19.2 D20.2 DBUS1.1 Designator29.2 IC1.6 IC1.9 P1.0 P1.2 P6.0 P7.0 P11.0 P12.0 P12.2 P13.1 P15.0 P15.1 P17.2 P17.4 P17.6 P17.8 P17.10 P17.12 P17.14 P18.0 P18.2 P19.0 P19.1 P21.1 Q4.2 R1.2 R6.2 R8.1 R10.2 R27.2 R28.1 R39.1 S1.A S2.A U1.1 U2.2 U2.8 U3.2 U3.8 U4.10 U4.20 U4.27 U4.74 U4.99 | length 7.4
  Bottom Layer w0.203: v1(33.977,31.301) 37.572,31.301 C16.2 ; v1(33.977,40.826) 37.572,40.826 C15.2
  other v1: 26.924,-2.794 28.067,-2.794 29.21,-2.794 30.353,-2.794 31.623,-2.794 32.766,-2.794 29.456,7.958 29.456,8.762 29.456,9.609 29.456,10.498 -3.302,15.24 -2.54,15.24 -1.778,15.24 41.317,16.518 42.27,16.518 -3.302,17.018 -2.54,17.018 -1.778,17.018 36.392,18.745 37.797,18.745 39.202,18.745 40.607,18.745 42.012,18.745 34.277,26.416 35.599,26.416 36.921,26.416 38.244,26.416 39.566,26.416 43.859,26.416 44.877,26.416 45.895,26.416 46.914,26.416 34.275,27.364 35.598,27.364 36.92,27.364 38.243,27.364 39.565,27.364 43.859,27.364 44.877,27.364 45.895,27.364 46.914,27.364 19.527,32.495 21.249,32.495 22.972,32.495 24.695,32.495 8.577,32.893 9.72,32.893 10.736,32.935 11.625,32.935 7.942,33.587 13.403,33.881 27.051,34.417 13.403,34.685 7.942,34.73 21.971,35.566 23.495,35.566 24.951,35.566 7.942,36 27.051,36.106 37.333,36.762 38.518,36.762 39.703,36.762 40.888,36.762 42.072,36.762 43.257,36.762 44.442,36.762 45.626,36.762 46.811,36.762 21.971,36.83 23.495,36.83 24.951,36.83 7.942,37.143 27.051,37.796 21.971,37.973 23.495,37.973 24.951,37.973 7.942,38.286 13.276,38.881 7.942,39.429 27.051,39.485 13.276,39.624 1.973,40.064 8.577,40.318 9.72,40.318 10.736,40.318 11.625,40.318 1.973,40.868 27.051,41.175 1.973,41.672 1.973,42.477 39.158,43.688 40.344,43.688 41.529,43.688 42.809,50.673 43.815,50.673 42.809,51.689 43.815,51.689 35.829,58.801 37.096,58.801 38.362,58.801 39.628,58.801 40.894,58.801 15.807,58.877 16.916,58.877 43.408,61.214 44.695,61.214 45.982,61.214 47.269,61.214 19.406,62.865 20.402,62.865 21.398,62.865 22.394,62.865 23.39,62.865
I2C1_SCL(PB8): U4.95
I2C1_SDA(PB9): U4.96
I2C2_SCL(PB10): B10.4 U4.47 | length 27.2
  Top Layer w0.254: B10.4 7.747,22.438 22.879,22.438 27.986,27.545 27.986,28.697 U4.47
I2C2_SDA(PB11): B10.5 U4.48 | length 25.2
  Top Layer w0.254: B10.5 9.88,22.031 23.047,22.031 28.486,27.47 28.486,28.697 U4.48
ICM3V3: 
ICM_INT: U4.85
LASER: 
LASER(PD3): U4.84
LED1(PE2): R29.2 U4.1 | length 25.1
  Top Layer w0.254: v1(8.831,59.241) 9.466,59.876 10.616,59.876 11.202,60.462 11.227,60.462 11.583,60.817 R29.2 ; v1(11.625,44.001) 13.245,42.381 U4.1
  Bottom Layer w0.254: v1(8.831,59.241) 8.382,58.791 8.382,47.244 v1(11.625,44.001)
LED2(PE3): R32.2 U4.2 | length 24.5
  Top Layer w0.254: v1(7.815,59.241) 9.036,60.462 9.096,60.462 9.452,60.817 R32.2 ; v1(11.498,43.112) 12.729,41.881 U4.2
  Bottom Layer w0.254: 7.815,58.987 7.815,46.795 v1(11.498,43.112)
LED3(PE4): R35.2 U4.3 | length 25
  Top Layer w0.254: v1(6.926,59.241) 7.211,59.525 7.211,60.732 R35.2 ; v1(11.752,42.096) 12.467,41.381 U4.3
  Bottom Layer w0.254: 6.926,58.987 6.926,58.449 7.366,58.009 7.366,46.482 v1(11.752,42.096)
LED4(PE5): R36.2 U4.4 | length 26.9
  Top Layer w0.254: R36.2 5.19,59.579 v1(5.529,59.241) ; v1(10.228,42.223) 11.57,40.881 U4.4
  Bottom Layer w0.254: v1(5.529,59.241) 5.529,59.202 6.96,57.771 6.96,46.313 7.053,46.22 7.053,45.398 v1(10.228,42.223)
NetC1_1: C1.1 D2.1 IC1.8 L1.2
NetC1_2: C1.2 IC1.1 | length 3.5
  Top Layer w0.508: IC1.1 C1.2
NetC4_2: 
NetC5_2: 
NetC6_1: 
NetC6_2: 
NetC7_1: 
NetC7_2: 
NetC11_1: 
NetC24_1: 
NetC28_1: C28.1 U4.73 | length 4.3
  Top Layer w0.254: v1(29.024,41.334) 29.071,41.381 U4.73
  Bottom Layer w0.254: v1(29.024,41.334) C28.1
NetC29_1: C29.1 U4.12 Y1.2 | length 7
  Top Layer w0.203: Y1.2 9.593,38.585 10.491,37.686 10.591,37.686 10.754,37.524 C29.1 12.133,37.498 12.514,37.117 12.539,37.117 12.776,36.881 U4.12
NetC30_1: C30.1 U4.13 Y1.1 | length 7
  Top Layer w0.203: Y1.1 9.593,34.685 10.491,35.583 10.591,35.583 10.754,35.746 C30.1 12.133,35.771 12.514,36.152 12.539,36.152 12.768,36.381 U4.13
NetC31_1: C31.1 U4.49 | length 5.5
  Top Layer w0.254: v1(26.865,30.539) 28.425,30.539 28.995,29.969 U4.49
  Bottom Layer w0.254: C31.1 v1(26.865,30.539)
NetC32_1: 
NetCH1_6: 
NetD1_1: D1.1 R3.2 | length 2.3
  Top Layer w0.381: D1.1 v1(36.009,23.3)
  Bottom Layer w0.381: R3.2 34.94,23.3 v1(36.009,23.3)
NetD1_2: 
NetD2_2: 
NetD3_2: 
NetD4_1: D4.1 P1.3 R2.1 | length 9.9
  Top Layer w0.305: R2.1 40.03,55.622 40.361,55.952 40.361,55.977 40.781,56.398 45.517,56.398 v1(47.498,56.398)
  Bottom Layer w0.305: D4.1 45.771,56.398 v1(47.498,56.398)
NetD4_2: 
NetD5_1: D5.1 P1.4 R4.1 | length 10
  Top Layer w0.305: R4.1 40.03,54.094 40.361,54.424 40.361,54.449 41.059,55.148 45.517,55.148 v1(47.498,55.148)
  Bottom Layer w0.305: D5.1 45.588,55.148 v1(47.498,55.148)
NetD6_1: 
NetD9_1: D9.1 R29.1 | length 1.7
  Top Layer w0.254: R29.1 D9.1
NetD10_1: D10.1 R32.1 | length 1.7
  Top Layer w0.254: R32.1 D10.1
NetD11_1: D11.1 R35.1 | length 1.7
  Top Layer w0.254: R35.1 D11.1
NetD12_1: D12.1 P15.2 R33.1 | length 7.3
  Top Layer w0.254: R33.1 42.74,21.399 43.375,20.764 P15.2 v1(47.244,20.764)
  Bottom Layer w0.254: D12.1 46.984,20.955 47.175,20.764 v1(47.244,20.764)
NetD13_1: D13.1 P15.3 R34.1 | length 9.4
  Top Layer w0.254: R34.1 41.089,21.399 42.974,19.514 P15.3 v1(47.244,19.514)
  Bottom Layer w0.254: D13.1 45.974,19.514 v1(47.244,19.514)
NetD14_1: D14.1 R36.1 | length 1.8
  Top Layer w0.254: R36.1 D14.1
NetD19_1: D19.1 P18.3 R37.1 | length 9.3
  Top Layer w0.254: P18.3 v1(3.558,46.091) ; R37.1 v1(6.291,43.405)
  Bottom Layer w0.254: D19.1 3.37,46.137 4.756,46.137 6.291,44.602 v1(6.291,43.405)
NetD20_1: D20.1 P18.4 R38.1 | length 7
  Top Layer w0.254: P18.4 1.714,47.384 v1@3.558,47.384 ; v1@3.37,47.4 R38.1@7.434,47.4
  Bottom Layer w0.254: v1@3.37,47.398 D20.1
  other v1: 3.558,47.352
NetDBUS1_3: DBUS1.3 R26.2 | length 2.5
  Top Layer w0.305: DBUS1.3 27.449,63.453 R26.2
NetIC1_4: IC1.4 R7.1 R8.2 | length 5.2
  Top Layer w0.381: R8.2 30.04,13.47 31.482,13.47 ; IC1.4 31.482,13.47 ; R7.1 31.482,13.47
NetLED1_1: 
NetP5_2: 
NetQ1_1: Q1.1 R6.1
NetQ2_1: Q2.1 R10.1
NetQ3_1: 
NetQ3_3: 
NetQ4_1: Q4.1 R26.1 R27.1 | length 3.9
  Top Layer w0.381: R26.1 25.771,61.571 Q4.1 27.659,61.559 R27.1
NetR1_2: 
NetR3_2: 
NewNet: 
NRST: C14.2 R22.2 S2.B U4.14 | length 58.4
  Top Layer w0.254: U4.14 15.828,35.873 v1(18.356,35.873) ; S2.B 36.276,65.451 ; v1(36.263,66.353) 36.263,65.464 36.276,65.451 ; v1(41.567,57.754) 41.567,61.048 37.165,65.451 36.276,65.451
  Bottom Layer w0.254: v1(18.356,35.873) 24.833,42.35 36.889,42.35 41.567,47.028 v1(41.567,57.754) ; C14.2 v1(36.263,66.353) R22.2
PA5: Designator37.4 U4.30 | length 17.5
  Top Layer w0.254: Designator37.4 5.261,29.877 6.252,29.877 9.458,26.67 18.89,26.67 19.495,27.275 U4.30
PC4: Designator37.3 U4.33 | length 19.1
  Top Layer w0.254: Designator37.3 7.147,25.451 19.395,25.451 20.995,27.05 U4.33
PC5: P16.6 U4.34 | length 22.6
  Top Layer w0.254: P16.6 3.851,26.289 5.588,26.289 6.858,25.019 19.538,25.019 21.495,26.976 U4.34
PE7: Designator37.1 U4.38 | length 21.9
  Top Layer w0.254: Designator37.1 6.184,23.542 19.785,23.542 23.495,27.251 U4.38
PE8: U4.39
PE9: U4.40
PE10: U4.41
PE11: U4.42
PE12: U4.43
PE13: U4.44
PE14: U4.45
PE15: U4.46
RES: B10.3
SCL: U4.67
SDA: U4.66
SEG0: 
SEG1: 
SEG2: 
SPI1_MISO(PB4): Designator29.5 U4.90 | length 14.6
  Top Layer w0.254: v1(16.885,51.816) 16.902,51.816 22.495,46.224 U4.90
  Bottom Layer w0.254: Designator29.5@16.538,55.998 16.383,55.843 16.383,52.318 v1(16.885,51.816)
  Bottom Layer w0.381: Designator29.5 Designator29.5@16.538,55.998
SPI1_MOSI(PB5): Designator29.4 U4.91 | length 13.2
  Top Layer w0.254: v1(19.069,48.895) 19.194,48.895 21.995,46.094 U4.91
  Bottom Layer w0.254: v1(19.069,48.895) Designator29.4
SPI1_nCS(PD7): Designator29.6 U4.88 | length 17.7
  Top Layer w0.254: v1(14.732,53.594) 17.899,53.594 21.995,49.498 21.995,47.989 23.495,46.489 U4.88
  Bottom Layer w0.254: Designator29.6 13.989,54.337 v1(14.732,53.594)
SPI1_SCLK(PB3): Designator29.3 U4.89 | length 12.8
  Top Layer w0.254: v1(21.336,49.403) 21.336,48.073 22.995,46.414 U4.89
  Bottom Layer w0.254: v1(21.336,49.403) 21.336,51.435 Designator29.3@21.336,55.734
  Bottom Layer w0.381: Designator29.3@21.336,55.734 Designator29.3
SWCLK: R1.1 R2.2 U4.76 | length 17.7
  Top Layer w0.254: U4.76 29.495,48.503 36.639,55.647 38.305,55.647 R1.1
SWDIO: R4.2 R5.1 U4.72 | length 16.9
  Top Layer w0.254: U4.72 32.403,40.881 38.305,46.783 R4.2
TIM1_CH1(PD12): U4.59
TIM1_CH2(PD13): U4.60
TIM1_CH3(PD14): U4.61
TIM1_CH4(PD15): U4.62
TIM3_CH1(PA6): P16.4 U4.31 | length 20.9
  Top Layer w0.254: P16.4 3.616,28.981 6.05,28.981 8.768,26.264 19.059,26.264 19.995,27.2 U4.31
TIM3_CH2(PA7): P16.5 U4.32 | length 21.6
  Top Layer w0.254: P16.5 3.597,28.575 5.674,28.575 8.391,25.857 19.227,25.857 20.495,27.125 U4.32
TIM3_CH3(PB0): Designator37.2 U4.35 | length 19.8
  Top Layer w0.254: Designator37.2 6.325,24.978 6.69,24.613 19.707,24.613 21.995,26.901 U4.35
TIM3_CH4(PB1): P16.7 U4.36 | length 23.7
  Top Layer w0.254: P16.7 4.051,23.948 19.617,23.948 22.495,26.826 U4.36
TIM5_CH3(PA2): P16.1 U4.25 | length 18.4
  Top Layer w0.254: P16.1@2.654,37.678 4.767,35.565 4.767,33.333 7.719,30.381 U4.25
  Bottom Layer w0.254: P16.1@2.54,37.465 P16.1@3.148,38.073
TIM5_CH4(PA3): P16.2 U4.26 | length 18.3
  Top Layer w0.254: P16.2@2.654,35.138 2.654,34.811 7.514,29.951 17.229,29.951 17.486,29.694 17.486,28.714 U4.26
UART4_RX(PA1): R38.2 U4.24 | length 25.2
  Top Layer w0.254: R38.2 7.434,45.704 6.291,45.704 5.472,44.885 5.472,33.39 7.981,30.881 U4.24
UART4_TX(PA0): R37.2 U4.23 | length 17.6
  Top Layer w0.254: R37.2 6.291,33.274 8.185,31.381 U4.23
USART1_RX: P19.2 R12.1 | length 3.5
  Top Layer w0.254: P19.2 4.869,56.511 R12.1
USART1_RX(PB5): R12.2 U4.93 | length 20.1
  Top Layer w0.254: R12.2 7.175,55.905 10.615,55.905 20.986,45.534 20.986,44.064 U4.93
USART1_TX: P19.3 R11.1 | length 3.5
  Top Layer w0.254: P19.3 4.968,57.761 R11.1
USART1_TX(PB6): R11.2 U4.92 | length 21.3
  Top Layer w0.254: R11.2 9.183,57.912 21.486,45.609 21.486,44.064 U4.92
USART2_RX(PD6): Q4.3 R25.2 U4.87 | length 20.3
  Top Layer w0.254: U4.87 23.997,44.058 23.997,47.04 28.321,51.364 28.321,57.785 27.451,58.655 R25.2 27.165,59.209 Q4.3
USART3_RX(PD9): R34.2 U4.56 | length 20.3
  Top Layer w0.254: U4.56 32.636,32.881 34.985,35.23 v1(36.675,35.23) ; R34.2 v1(41.089,25.205)
  Bottom Layer w0.254: v1(36.675,35.23) 38.064,33.841 39.565,33.841 41.089,32.317 v1(41.089,25.205)
USART3_TX(PD8): R33.2 U4.55 | length 21.5
  Top Layer w0.254: U4.55 32.843,32.381 34.938,34.476 v1(38.93,34.476) ; R33.2 v1(42.74,25.179)
  Bottom Layer w0.254: v1(38.93,34.476) 40.581,34.476 42.74,32.317 v1(42.74,25.179)
USB_DN: 
USB_DP: 
VBAT: C11.2 C12.2 C24.2 D3.2 D6.2 D7.2 P12.1 P13.2 P21.2 Q1.2 Q2.2
VCC: 
pads on no net: IC1.2 IC1.3 IC1.5 U2.5 U3.5 U4.5 U4.7 U4.8 U4.9 U4.15 U4.16 U4.17 U4.18 U4.53 U4.54 U4.57 U4.58 U4.63 U4.64 U4.65 U4.68 U4.69 U4.77 U4.78 U4.79 U4.80 U4.81 U4.82 U4.86 U4.97 U4.98

## Polygon pours and split planes (outlines as drawn)
GND on Bottom Layer "GND_L02_P238" (solid, remove dead copper, pour order 238): -3.745,20.296 -3.745,14.351 -1.397,14.351 -1.397,20.296
5V on Bottom Layer "5V_L02_P224" (solid, remove dead copper, pour order 224): 7.366,59.655 7.366,59.69 5.529,61.527 5.529,61.82 7.804,61.82 7.815,61.831 7.815,59.655
5V on Bottom Layer "5V_L02_P220" (solid, remove dead copper, pour order 220): -0.933,49.491 -0.005,50.419 0.906,50.419 0.906,49.149 -0.933,49.149
VBAT on Bottom Layer "NONET_L04_P-001" (solid, remove dead copper, pour order 205): -0.201,8.403 ccw(c-1.076,6.155) -3.488,6.154 -3.488,6.028 ccw(c-0.508,6.028) -0.605,3.05 4.209,2.893 cw(c6.031,-32.405) 11.848,2.458 ccw(c11.979,4.736) 12.257,2.472 15.167,2.472 cw(c15.169,-4.769) 20.291,0.349 21.023,-0.449 ccw(c23.435,1.036) 22.779,-1.719 40.418,-1.719 ccw(c39.948,1.483) 42.545,-0.449 43.623,0.628 ccw(c39.46,3.978) 44.772,4.555 44.772,7.298 cw(c45.692,7.298) 45.041,7.948 45.788,8.695 cw(c47.014,7.469) 47.014,9.203 48.038,9.203 ccw(c48.038,11.743) 49.834,9.946 49.852,9.965 ccw(c48.934,10.884) 50.233,10.884 50.233,12.04 ccw(c48.502,12.041) 49.725,13.267 ccw(c48.5,12.044) 48.499,13.775 46.887,13.775 ccw(c46.733,12.108) 45.661,13.394 45.041,12.886 42.722,10.708 ccw(c44.515,8.914) 42.033,9.439 41.43,7.131 cw(c39.892,7.686) 40.767,6.305 cw(c39.148,7.965) 39.116,5.647 19.027,5.647 cw(c18.312,8.107) 16.815,6.028 16.098,6.619 cw(c18.683,8.284) 15.628,8.632 ccw(c12.716,8.634) 14.773,10.695 ccw(c13.081,8.311) 13.078,11.235 12.545,11.235 ccw(c12.901,9.071) 11.117,10.346 ccw(c13.189,8.548) 10.446,8.603 10.355,7.806 cw(c9.619,7.856) 10.14,7.334 9.847,6.917 cw(c8.845,7.734) 8.582,6.468 2.227,6.468 cw(c2.751,8.449) 1.023,7.347 ccw(c-0.688,6.602)
GND on Bottom Layer "NONET_L04_P-001" (solid, remove dead copper, pour order 213): -4.004,17.324 50.987,17.324 50.987,-1.328 cw(c48.447,-1.328) 48.447,-3.868 -1.464,-3.868 cw(c-1.464,-1.328) -4.004,-1.328
24V on Bottom Layer "NONET_L04_P-001" (solid, remove dead copper, pour order 212): 39.311,7.552 39.311,12.505 16.959,12.505 16.959,6.663 19.753,6.663 19.753,10.981 27.246,10.981 27.246,7.552 28.897,7.552 28.897,10.981 37.787,10.981 37.787,7.552
NetQ2_1 on Bottom Layer "NONET_L04_P-001" (solid, remove dead copper, pour order 211): 30.548,9.203 32.961,9.203 32.961,9.838 34.485,9.838 34.485,7.552 32.961,7.552 32.961,8.187 30.548,8.187
NetQ1_1 on Bottom Layer "NONET_L04_P-001" (solid, remove dead copper, pour order 210): 20.134,9.203 22.547,9.203 22.547,9.838 24.071,9.838 24.071,7.552 22.547,7.552 22.547,8.187 20.134,8.187
GND on Bottom Layer "NONET_L04_P-001" (solid, remove dead copper, pour order 183): -1.397,69.088 48.319,69.088 cw(c48.319,66.548) 50.859,66.548 50.859,17.914 -4.127,17.914 -4.127,66.548 cw(c-1.587,66.548) -1.587,69.088
GND on Top Layer "GND_L01_P236" (solid, remove dead copper, pour order 236): -3.745,18.796 -3.745,14.859 -0.948,14.859 -0.948,18.796
GND on Top Layer "NONET_L04_P-001" (solid, remove dead copper, pour order 178): -1.016,68.834 48.7,68.834 cw(c48.7,66.294) 51.24,66.294 51.24,17.798 -3.746,17.798 -3.746,66.294 cw(c-1.206,66.294) -1.206,68.834
GND on Top Layer "NONET_L04_P-001" (solid, remove dead copper, pour order 201): 34.18,16.34 36.085,16.34 36.085,9.863 34.18,9.863
24V on Top Layer "NONET_L04_P-001" (solid, remove dead copper, pour order 156): 26.865,8.263 26.865,9.025 25.214,9.025 24.198,8.39 16.959,8.39 16.959,6.701 24.078,6.701 25.214,8.263
GND on Top Layer "NONET_L04_P-001" (solid, remove dead copper, pour order 157): 30.04,10.295 30.04,9.533 25.214,9.533 24.198,10.168 20.134,10.168 20.134,11.819 24.106,11.819 25.214,10.295
NetC1_1 on Top Layer "NONET_L04_P-001" (solid, remove dead copper, pour order 163): 38.93,0.643 38.93,2.675 25.595,2.675 25.595,5.342 23.309,5.342 23.309,1.659 35.374,1.659 35.374,0.643
NetC1_1 on Top Layer "NONET_L04_P-001" (solid, remove dead copper, pour order 164): 26.865,7.755 25.29,7.755 25.29,6.955 23.309,5.469 23.309,5.088 25.595,5.088 26.865,6.993
GND on Top Layer "NONET_L04_P-001" (solid, remove dead copper, pour order 168): 29.989,3.386 27.703,3.386 27.703,10.79 29.989,10.79
GND on Top Layer "NONET_L04_P-001" (solid, remove dead copper, pour order 195): 27.754,13.978 27.754,10.803 28.897,10.803 28.897,13.978
GND on Top Layer "NONET_L04_P-001" (solid, remove dead copper, pour order 186): -3.81,-1.143 -3.81,-1.341 ccw(c-1.27,-1.341) -1.27,-3.881 48.645,-3.881 ccw(c48.645,-1.341) 51.185,-1.341 51.185,17.162 -3.806,17.162
no net on Top Layer "NONET_L01_P072" (solid, remove dead copper, pour order 72): 37.338,42.858 37.338,45.779
no net on Top Layer "NONET_L01_P048" (solid, remove dead copper, pour order 48): 54.483,22.411 54.483,17.839 54.483,17.966
no net on Top Layer "NONET_L01_P049" (solid, remove dead copper, pour order 49): 54.483,22.411 54.483,17.966
no net on Top Layer "NONET_L01_P055" (solid, remove dead copper, pour order 55): 30.617,49.208 31.887,49.208 32.014,49.208
no net on Top Layer "NONET_L01_P023" (solid, remove dead copper, pour order 23): 13.208,19.744 13.208,16.823
no net on Top Layer "NONET_L01_P022" (solid, remove dead copper, pour order 22): 13.208,19.744 13.208,17.077

## Keep-outs
Keep-Out Layer:
  circle w0.152: c0,0 r2.8
  circle w0.152: c46.995,-0.005 r2.8
  circle w0.152: c-0.005,64.995 r2.8
  circle w0.152: c46.995,64.995 r2.8
  lines w0.2: -4.009,66.222 cw(c-1.265,66.222) -1.27,68.966 ; -4.004,-1.29 ccw(c-1.26,-1.285) -1.26,-4.029 ; 48.243,68.961 cw(c48.243,66.217) 50.986,66.222 ; 48.253,-4.034 ccw(c48.248,-1.29) 50.991,-1.29
  lines w0.203: -4.004,-1.286 -4.004,66.227 ; -1.27,68.961 48.243,68.961 ; -1.26,-4.029 48.258,-4.029 ; 50.986,-1.3 50.986,66.222

## Other copper
Top Layer:
  rectangle net 5V: 32.453,16.594 39.514,17.331
  rectangle net 5V: 32.453,14.664 33.418,17.331
  rectangle net 5V: 44.288,58.557 48.539,59.182
  rectangle net 5V: -1.202,43.239 1.465,44.001
  rectangle net 5V: 37.736,14.249 43.629,15.878
  rectangle net 5V: 37.736,7.069 39.514,17.331
  rectangle net 5V: 35.196,7.069 39.514,9.355
  pour cut-out: 36.571,32.422 cw(c36.571,32.476) 36.517,32.476 36.517,34.222 36.009,34.222
  pour cut-out: 36.586,30.031 36.586,30.088 ccw(c35.882,30.088) 35.882,30.793 34.231,30.793 cw(c34.231,31.428) 33.596,31.428 cw(c33.977,31.428) 33.977,31.809 35.824,31.809 ccw(c35.824,32.571) 36.586,32.571 34.485,32.571 ccw(c34.485,31.047) 32.961,31.047 32.961,30.539 ccw(c33.342,30.539) 33.342,30.158
  pour cut-out: 36.586,39.556 36.586,39.613 ccw(c35.882,39.613) 35.882,40.318 34.231,40.318 cw(c34.231,40.953) 33.596,40.953 cw(c33.977,40.953) 33.977,41.334 35.824,41.334 ccw(c35.824,42.096) 36.586,42.096 34.485,42.096 ccw(c34.485,40.572) 32.961,40.572 32.961,40.064 ccw(c33.342,40.064) 33.342,39.683
  pour cut-out: 3.878,21.268 4.146,21.535 4.178,21.535 4.178,23.34 4.18,23.343 5.566,23.343 5.76,23.536 5.711,23.585 5.711,23.663 4.169,23.663 3.878,23.373
  pour cut-out: 4.436,29.414 4.42,29.398 4.42,29.266 3.878,29.266 3.878,33.018 3.947,33.018 3.995,33.067 7.374,29.688 7.405,29.688 7.405,28.981
  pour cut-out: 22.28,48.107 22.314,48.073 24.495,48.073 24.495,47.91 23.712,47.127 23.712,46.854 23.638,46.854 23.585,46.801
  pour cut-out: 9.935,42.516 11.242,43.823 11.242,42.964 12.1,42.107 12.1,41.165 11.688,41.165
  pour cut-out: 43.375,21.75 43.468,21.75 44.002,21.216 43.964,21.178 43.364,21.178 43.025,21.517
  pour cut-out: 41.148,23.114 41.191,23.071 42.74,23.071 42.74,22.695 42.455,22.411
  pour cut-out: 46.807,21.216 46.807,19.093 46.101,19.799
  pour cut-out: 39.75,40.826 39.75,39.556 46.476,39.556 46.914,39.117 46.916,39.12 46.916,40.82
  pour cut-out: 39.75,31.301 46.914,31.301 46.914,30.015 39.765,30.015 39.75,30.031
  pour cut-out: 36.551,29.187 36.551,28.761 36.247,28.761
  pour cut-out: 36.586,30.158 36.551,30.158 36.551,29.187 36.301,29.187
  pour cut-out: 36.586,42.058 36.586,44.703 36.331,44.703
  pour cut-out: 32.288,42.163 32.288,41.599 32.508,41.599
  pour cut-out: 29.613,42.871 29.962,42.871 29.962,42.381
  pour cut-out: 37.154,62.765 36.236,61.4 36.236,62.103
  pour cut-out: 3.556,38.558 5.187,38.558 5.187,40.064
  pour cut-out: 40.81,17.051 40.784,17.026 40.784,16.043 40.777,16.043 40.683,16.137
  pour cut-out: 21.912,6.663 23.144,6.663 23.144,5.469
  pour cut-out: 27.03,9.025 27.012,9.025 27.012,7.374 26.865,7.374
  pour cut-out: 36.586,39.556 36.586,38.286 36.263,38.921
  pour cut-out: 36.517,36.127 36.517,34.73 37.787,34.73
  pour cut-out: 36.586,38.286 36.586,35.492 35.882,35.492
  pour cut-out: 1.752,38.58 1.752,21.173 1.846,21.268 3.878,21.268 3.878,37.397 5.021,38.54
Bottom Layer:
  rectangle net 5V: 46.855,58.42 48.547,60.257
  rectangle net 5V: 1.079,61.18 6.926,61.831
  rectangle net 5V: -0.005,49.784 0.906,61.18
  rectangle net 5V: 13.97,59.655 15.22,60.935
  rectangle net 5V: 35.672,13.648 43.629,15.708
  rectangle net 5V: 34.104,59.622 48.547,60.257
  rectangle net 5V: 24.96,59.622 34.866,60.257
  rectangle net 5V: 24.071,59.944 25.722,66.882
  rectangle net 5V: 7.366,59.655 24.892,61.831
  rectangle net 5V: -0.933,21.675 0.906,49.486
  pour cut-out: 5.969,61.052 7.366,59.655 5.969,59.655
  pour cut-out: 0,50.419 -0.933,49.486 -0.933,50.419
  pour cut-out: -0.005,61.18 0.635,61.82 0.624,61.831 -0.005,61.831
  pour cut-out: 41.089,24.79 41.114,24.765 42.74,24.765 42.74,24.824 42.037,25.527
  pour cut-out: 31.843,43.493 31.843,43.269 31.183,43.269 31.183,43.556
  pour cut-out: 30.523,43.521 30.523,43.269 31.048,43.269
  pour cut-out: 27.178,49.784 27.178,51.639 28.829,51.639
  pour cut-out: 21.887,47.472 27.152,47.472 27.152,51.55
  pour cut-out: 6.291,42.99 6.291,43.942 5.058,43.942
  pour cut-out: 30.607,29.845 27.157,29.845 27.157,30.16
  pour cut-out: 38.93,34.89 36.675,34.89 36.675,35.644
  pour cut-out: 3.887,43.942 6.229,43.942 6.291,44.003 6.291,44.636
  pour cut-out: 10.228,41.808 10.355,41.681 11.752,41.681 11.752,42.096 11.459,42.389
  pour cut-out: 5.529,59.655 8.831,59.655 8.831,59.241
  pour cut-out: 24.188,7.435 27.246,7.435 27.246,8.187
  pour cut-out: 39.476,12.886 39.476,13.775 39.057,13.775 38.93,13.648
  pour cut-out: 32.453,19.49 32.453,17.828 30.675,17.828
  pour cut-out: 33.539,19.919 33.539,17.828 35.672,17.828
  pour cut-out: 38.422,15.971 37.556,15.971 37.556,15.768
  pour cut-out: 37.787,17.458 37.787,15.463 37.324,15.463 37.324,17.458

## Silkscreen, mask and mechanical layers (free items; w line width, h text height)
Top Overlay:
  drawing of 341 lines, arcs and shapes, not listed
  text "RX 5V GND" at 28.389,68.385 h0.76 r180
  text "RESET" at 38.168,68.385 h0.76 r180
  text "E2 E3 E4 E5" at 12.387,68.258 h0.76 r180
  text "复位" at 44.264,65.966 h1.52 r180
  text "D2" at 44.106,63.051 h0.76 r180
  text "EXTI2" at 45.122,61.908 h0.76 r180
  text "串口1" at 5.207,54.61 h2.03 r270
  text "SD SC G 5" at 42.393,52.603 h0.89 r90
  text "RoboMaster" at 25.273,48.641 h3.05
  text "串口4" at 5.08,48.26 h2.03 r270
  text "R T G 5" at 3.784,48.065 h0.76 r270
  text "UART4" at -3.757,47.589 h0.76 r270
  text "L H" at 44.45,43.053 h0.76 r90
  text "CAN1" at 43.121,42.594 h0.89 r90
  text "A2" at 4.064,38.1 h0.76 r270
  text "A3" at 4.064,35.687 h0.76 r270
  text "L H" at 44.899,33.333 h0.76 r90
  text "A4" at 4.064,33.26 h0.76 r270
  text "CAN2" at 43.502,32.825 h0.89 r90
  text "A6" at 6.604,30.48 h0.76 r270
  text "A5" at 7.747,30.48 h0.76 r270
  text "A7" at 6.604,27.813 h0.76 r270
  text "C4" at 7.747,27.813 h0.76 r270